# Altium PCB PCB.PcbDoc
Units mil, origin at the board's own origin, x right, y up, seen from the top; angles counter-clockwise.
Board outline 3270 x 4330 mil, 2 copper layers (Top Layer, Bottom Layer); 105 components, 51 nets, 283 pads, 395 vias.
Unrouted connection lines stored in the file: 1.
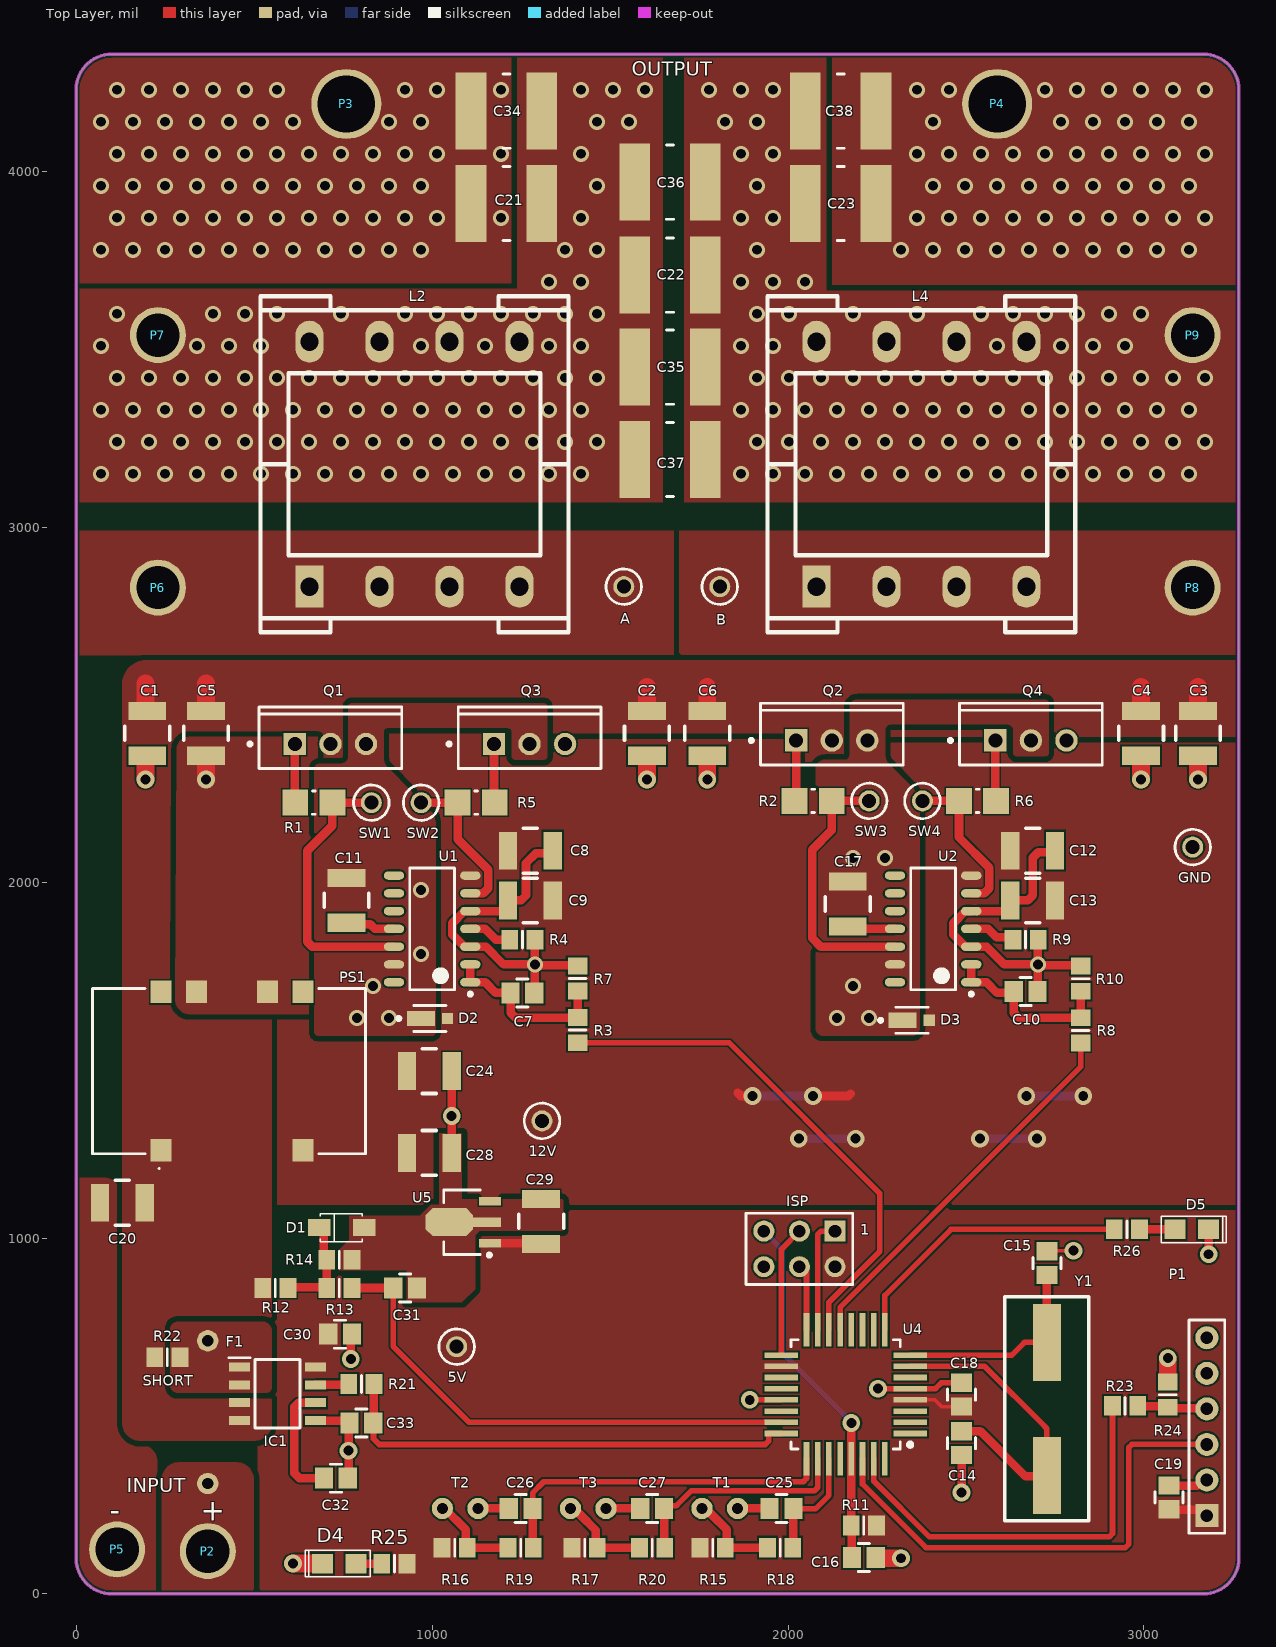
[diagram p0: Top Layer view]
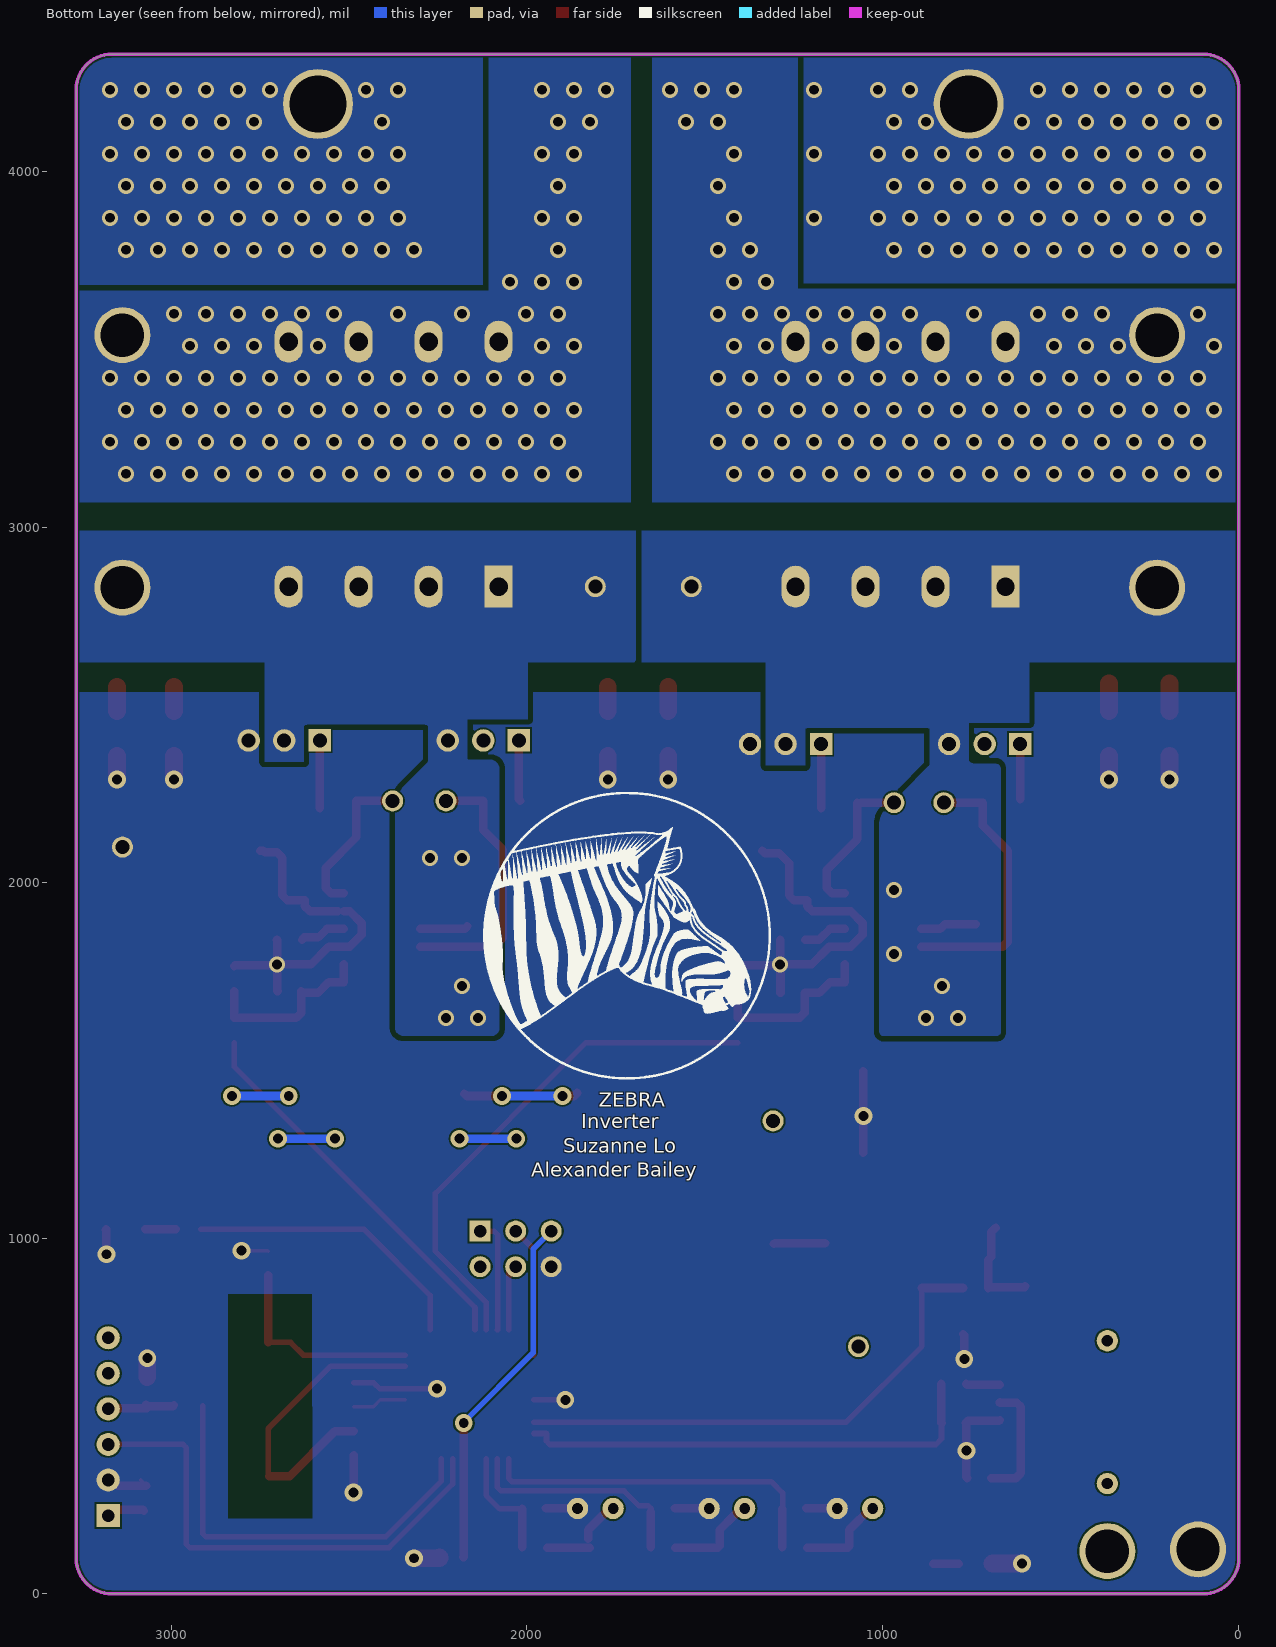
[diagram p1: Bottom Layer view, seen from below]
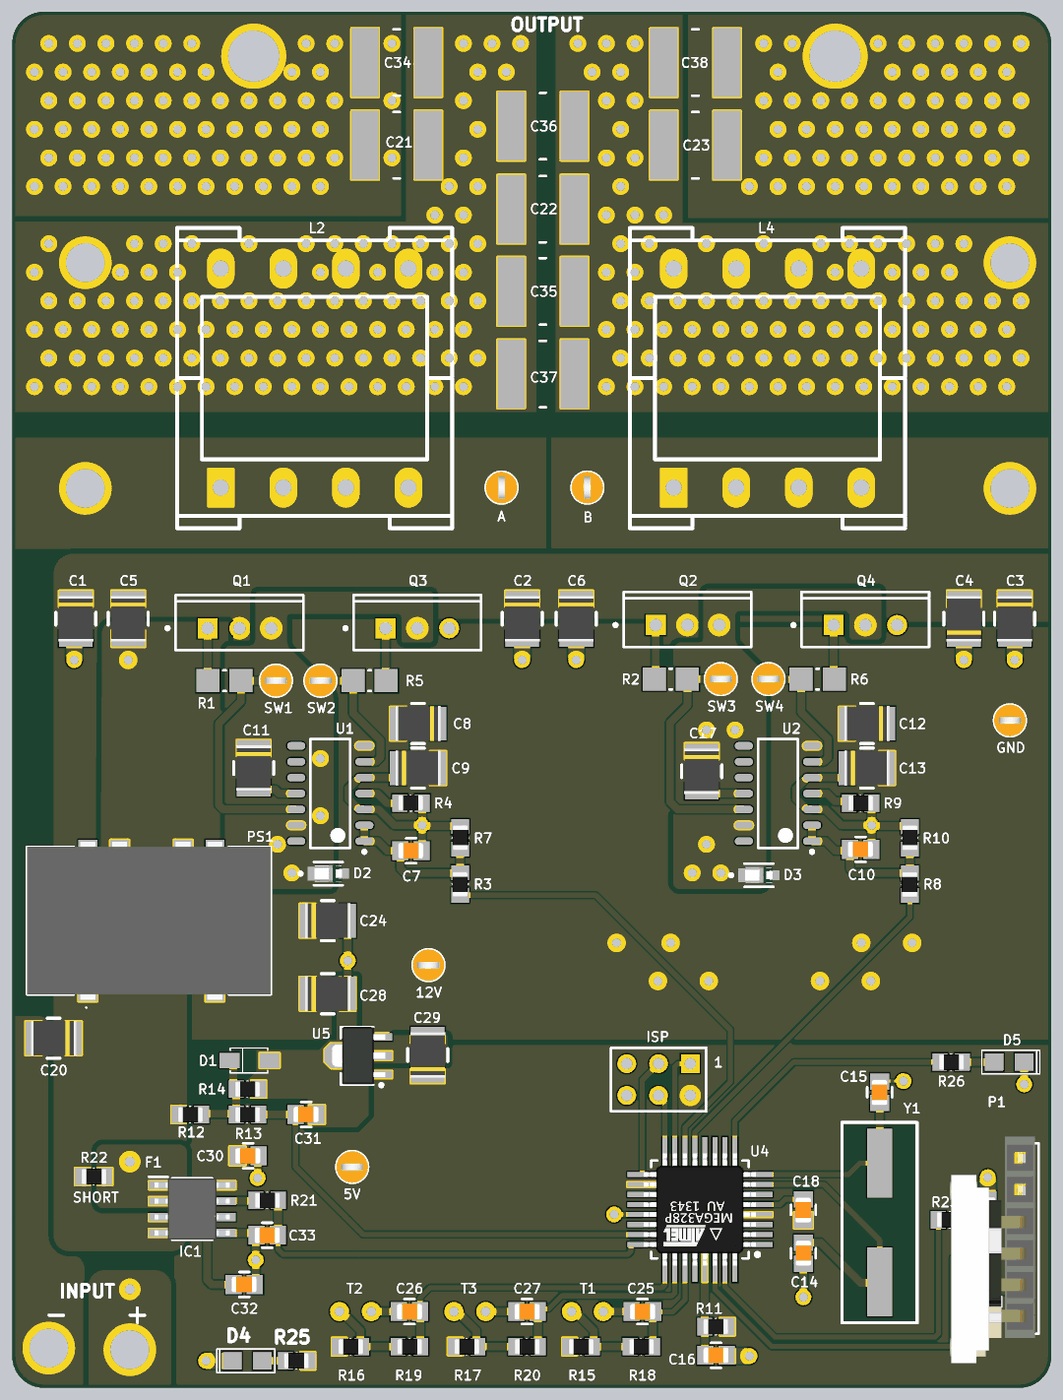
[diagram p2: 3D render of the assembled board from above, using the file's embedded part models]

## Layer stack, top to bottom
Top Solder: solder mask 0.4, Solder Resist, Dk 3.5
Top Layer: signal copper 1.4
Dielectric 1: dielectric 12.6, FR-4, Dk 4.8
Bottom Layer: signal copper 1.4
Bottom Solder: solder mask 0.4, Solder Resist, Dk 3.5

## Board outline
-2.2,100 ccw(c97.8,100) 97.8,0 3167.8,0 ccw(c3167.8,100) 3267.8,100 3267.8,4230 ccw(c3167.8,4230) 3167.8,4330 97.8,4330 ccw(c97.8,4230) -2.2,4230

## Design rules (kind name [scope] priority, off if disabled: settings)
Clearance Compensation [InNamedPolygon('LPT_A_L01_P036') Or InNamedPolygon('LPT_B_L01_P038') Or InNamedPolygon('NETC21_1_L01_P032') Or InNamedPolygon('NETC22_1_L01_P033')] p1: gap=20 ignorepadtopadclearanceinfootprint=FALSE except(78.74: Fill-Fill Fill-Poly Fill-Region Poly-Poly Poly-Region Region-Region)
Clearance [All] p2: gap=5 ignorepadtopadclearanceinfootprint=FALSE except(15.75: Fill-Fill Fill-Poly Fill-Region Poly-Poly Poly-Region Region-Region)
Height [All] p1: minheight=0 maxheight=5000 prefheight=500
HoleSize [All] p1: absolutevalues=TRUE maxlimit=165 minlimit=1 maxpercent=80.000 minpercent=20.000
MinimumSolderMaskSliver [All] p1: minsoldermaskwidth=5
PolygonConnect [All] p1: connectstyle=Direct reliefconductorwidth=10 reliefentries=4 polygonreliefangle="90 Angle" airgapwidth=0
RoutingVias [All] p1: holewidth=28 width=50 viastyle="Through Hole" minholewidth=28 minwidth=40 maxholewidth=28 maxwidth=50
SilkToSolderMaskClearance [All] p1: minsilkscreentomaskgap=1.5 clearancetoexposedcopper=TRUE
SolderMaskExpansion [All] p1: expansion=4 istentingtop=FALSE
Width "uC Route" [InComponent('U4')] p1: maxlimit=16 minlimit=16 preferedwidth=16 minimp=50.000000 maximp=50.000000 favimp=50.000000
Width [All] p2: maxlimit=50 minlimit=10 preferedwidth=24 minimp=50.000000 maximp=50.000000 favimp=50.000000
26 further rules are at their usual default settings.

## Classes and differential pairs
component class Misc: 5V 12V A B C20 C24 C25 C26 C27 C28 C29 C30 C31 C32 C33 D1 F1 GND IC1 P2 P3 P4 P5 PS1 R12 R13 R14 R15 R16 R17 R18 R19 R20 R21 R22 sw1 sw2 SW3 SW4 T1 T2 T3 U5
component class Control: C14 C15 C16 C18 C19 D4 D5 ISP P1 R11 R23 R24 R25 R26 U4 Y1
component class Bridge: C1 C2 C3 C4 C5 C6 C7 C8 C9 C10 C11 C12 C13 C17 C21 C22 C23 C34 C35 C36 C37 C38 D2 D3 L2 L4 P6 P7 P8 P9 Q1 Q2 Q3 Q4 R1 R2 R3 R4 R5 R6 R7 R8 R9 R10 U1 U2

## Components (designator, comment, footprint, x,y, rotation, side; value= is the part's Value field where it differs from the comment)
5V "5003" TP_TH 1067.8,695 r0 top (schematic designator TP5)
12V "5003" TP_TH 1307.8,1330 r0 top (schematic designator TP3)
A "5003" TP_TH 1537.8,2832.51 r90 top (schematic designator TP10)
B "5003" TP_TH 1807.8,2832.51 r90 top (schematic designator TP11)
C1 "" C1210 197.8,2420 r270 top
C2 "" C1210 1602.8,2420 r270 top
C3 "" C1210 3152.8,2420 r270 top
C4 "" C1210 2992.8,2420 r90 top
C5 "" C1210 362.8,2420 r270 top
C6 "" C1210 1772.8,2420 r270 top
C7 "" C0805 1252.8,1690 r0 top
C8 "" C1210 1274.8,2090 r180 top
C9 "" C1210 1274.8,1950 r0 top
C10 "" C0805 2667.8,1694.09 r0 top
C11 "10u" C1210 757.8,1950 r270 top
C12 "" C1210 2687.8,2090 r180 top
C13 "" C1210 2687.8,1950 r0 top
C14 "" C0805 2487.8,423.46 r270 top
C15 "" C0805 2727.8,930 r90 top
C16 "" C0805 2212.8,102.18 r0 top
C17 "10u" C1210 2167.8,1940 r270 top
C18 "" C0805 2487.8,560 r90 top
C19 "" C0805 3070.8,271 r90 top
C20 "10u" C1210 127.8,1100 r180 top
C21 "" C5750 1207.8,3910 r180 top
C22 "" C5750 1667.8,3708.59 r180 top
C23 "" C5750 2147.8,3910 r0 top
C24 "10u" C1210 990.79,1470 r0 top
C25 "" C0805 1981.26,240 r180 top
C26 "" C0805 1247.8,240 r180 top
C27 "" C0805 1617.8,240 r180 top
C28 "10u" C1210 990.79,1240 r0 top
C29 "10u" C1210 1305.39,1047.17 r90 top
C30 "" C0805 740,730 r0 top
C31 "" C0805 922.8,860 r0 top
C32 "" C0805 727.99,325 r0 top
C33 "" C0805 800,480 r180 top
C34 "" C5750 1207.8,4170 r180 top
C35 "" C5750 1667.8,3450 r180 top
C36 "" C5750 1667.8,3970 r180 top
C37 "" C5750 1667.8,3190 r180 top
C38 "" C5750 2147.8,4170 r0 top
D1 "BZT52H-B5V1" SOD123 742.8,1030 r180 top
D2 "MSS1P6-M3/89A" FP-96591-MFG 992.6,1618 r0 top value=40pF
D3 "MSS1P6-M3/89A" FP-96591-MFG 2347.8,1613 r0 top value=40pF
D4 "LTST-C170KGKT" "0805 LED" 737.8,85 r180 top
D5 "LTST-C170KGKT" "0805 LED" 3135.55,1025 r0 top
F1 "MF-RX250/72-0" TH_FUSE 367.8,310 r90 top
GND "5003" TP_TH 3137.8,2100 r0 top (schematic designator TP2)
IC1 "ACS730KLCTR-20AB-T" SOIC127P600X175-8N 564,562.5 r0 top
ISP "P2" HDR2X3 2131.81,1020 r180 top
L2 "" EFD20 949.37,3177 r90 top
L4 "" EFD20 2374.8,3177 r90 top
P1 "BLE Module Header" HM10_HDR1X6 3177.8,220 r90 top
P2 "Lug" "M3 Lug" 367.8,120 r0 top
P3 "Lug" "M4 Lug" 757.8,4190 r0 top
P4 "Lug" "M4 Lug" 2587.8,4190 r0 top
P5 "Lug" "M3 Lug" 112.8,125 r0 top
P6 "Lug" "M3 Lug" 227.8,2830 r0 top
P7 "Lug" "M3 Lug" 227.8,3540 r0 top
P8 "Lug" "M3 Lug" 3137.8,2830 r0 top
P9 "Lug" "M3 Lug" 3137.8,3540 r0 top
PS1 "STH0548S12" STH0548S12 427.8,1470 r0 top
Q1 "IPP80N04S4-04" INF-PG-TO220-3-1 712.8,2390 r90 top
Q2 "IPP80N04S4-04" INF-PG-TO220-3-1 2122.8,2400 r90 top
Q3 "IPP80N04S4-04" INF-PG-TO220-3-1 1272.8,2390 r90 top
Q4 "IPP80N04S4-04" INF-PG-TO220-3-1 2682.8,2400 r90 top
R1 "" R1206 665.96,2225 r180 top
R2 "" R1206 2070.63,2230 r180 top
R3 "" R0805 1407.8,1585.43 r90 top
R4 "" R0805 1252.8,1840 r0 top
R5 "" R1206 1122.8,2225 r180 top
R6 "" R1206 2532.8,2230 r180 top
R7 "" R0805 1407.8,1730.43 r270 top
R8 "" R0805 2822.8,1584.57 r90 top
R9 "" R0805 2667.8,1840 r180 top
R10 "" R0805 2822.8,1730 r270 top
R11 "" R0805 2212.8,192.18 r0 top
R12 "" R0805 557.8,860 r180 top
R13 "" R0805 737.8,860 r180 top
R14 "" R0805 737.8,940 r180 top
R15 "" R0805 1787.8,130 r180 top
R16 "" R0805 1062.36,130 r180 top
R17 "" R0805 1427.8,130 r180 top
R18 "" R0805 1977.8,130 r180 top
R19 "" R0805 1247.8,130 r180 top
R20 "" R0805 1617.8,130 r180 top
R21 "" R0805 800,590 r180 top
R22 "0R" R0805 254,665 r180 top
R23 "" R0805 2947.8,528.5 r0 top
R24 "" R0805 3067.8,560 r270 top
R25 "" R0805 892.8,85 r0 top
R26 "" R0805 2952.8,1025 r180 top
SW1 "5003" TP_TH 827.8,2225 r0 top (schematic designator TP6)
SW2 "5003" TP_TH 967.8,2225 r0 top (schematic designator TP7)
SW3 "5003" TP_TH 2227.8,2230 r0 top (schematic designator TP8)
SW4 "5003" TP_TH 2377.8,2230 r0 top (schematic designator TP9)
T1 "Thermistor" LeadedThermistor 1857.8,240 r90 top
T2 "Thermistor" LeadedThermistor 1127.8,240 r90 top
T3 "Thermistor" LeadedThermistor 1487.8,240 r90 top
U1 "IR21834STRPBF" SOIC127P600X175-14N 998.8,1870 r180 top
U2 "IR21834STRPBF" SOIC127P600X175-14N 2407.8,1870 r180 top
U4 "ATmega328PB MCU" "32 - TQFP" 2162.05,561.1 r180 top
U5 "L78L05" SOT-89 1082.8,1045 r180 top
Y1 "SMT-XTAL 16MHz" HC49-US 2727.8,520 r90 top

## Footprints (in the part's own frame and the unit in brackets; to place one, negate y for a bottom-side part, rotate by r counter-clockwise, add the part's x,y. Pads: shape width x height; smd on the part's side, far side on the other; paste and mask are expansions set on the pad)
"32 - TQFP" [mm]
  rect 2.4x0.4 smd: 1(-4.6,2.8) 2(-4.6,2) 3(-4.6,1.2) 4(-4.6,0.4) 5(-4.6,-0.4) 6(-4.6,-1.2) 7(-4.6,-2) 8(-4.6,-2.8) 17(4.6,-2.8) 18(4.6,-2) 19(4.6,-1.2) 20(4.6,-0.4) 21(4.6,0.4) 22(4.6,1.2) 23(4.6,2) 24(4.6,2.8)
  rect 0.4x2.4 smd: 9(-2.8,-4.6) 10(-2,-4.6) 11(-1.2,-4.6) 12(-0.4,-4.6) 13(0.4,-4.6) 14(1.2,-4.6) 15(2,-4.6) 16(2.8,-4.6) 25(2.8,4.6) 26(2,4.6) 27(1.2,4.6) 28(0.4,4.6) 29(-0.4,4.6) 30(-1.2,4.6) 31(-2,4.6) 32(-2.8,4.6)
  silkscreen extent -4.74,-3.9 3.9,3.9, body extent -4.5,-4.5 4.5,4.5, height 1.3
"0805 LED" [mm] "RED AS AlGaAs SMD LED, Body; 2mm x 1.25 mm (LxW)"
  rect 1.5x1.4 smd: 1(-1.2,0) 2(1.2,0)
  silkscreen extent -2.2,-0.95 2.45,0.95, body extent -1,-0.63 1,0.63, height 1.1
C0805 [mm]
  rect 1.3x1.5 smd: 1(-0.85,0) 2(0.85,0)
  silkscreen extent -0.4,-1 0.4,1, body extent -1.03,-0.63 1,0.64, height 0.65
C1210 [mm]
  rect 1.3x2.7 smd: 1(-1.6,0) 2(1.6,0)
  silkscreen extent -0.5,-1.6 0.5,1.6, body extent -1.8,-1.4 1.8,1.4, height 1.24
C5750 [mm] "C5750 footprint"
  rect 2.2x5.5 smd: 1(-2.525,0) 2(2.525,0)
  silkscreen extent -0.25,-2.65 0.25,2.65, body extent -3.05,-2.7 3.05,2.7, height 3.2
EFD20 [mm]
  oval 3x2 hole 1.3: 1(-8.75,-7.5) 1(-8.75,-2.5) 1(-8.75,2.5) 2(8.75,-7.5) 2(8.75,-2.5) 2(8.75,2.5) 2(8.75,7.5)
  rect 3x2 hole 1.3: 1(-8.75,7.5)
  silkscreen extent -12,-11 12,11
FP-96591-MFG [mm]
  rect 2x1.1 smd paste+0 mask+0: 1(-0.65,0)
  rect 0.8x0.8 smd paste+0 mask+0: 2(1.25,0)
  silkscreen extent -2.35,-0.92 1.15,0.92, body extent -1.75,-0.8 1.75,0.8, height 0.25
HC49-US [mm] "20Mhz Crystal"
  rect 5.5x2 smd: 1(-4.75,0) 2(4.75,0)
  silkscreen extent -8,-3 8,3, body extent -4.79,-2.4 4.79,2.4, height 3.8
HDR2X3 [mm] "Connector; Header; 3x2 Position"
  rect 1.5x1.5 hole 0.9: 1(0,0)
  round 1.5 hole 0.9: 2(0,2.54) 3(2.54,0) 4(2.54,2.54) 5(5.08,0) 6(5.08,2.54)
  silkscreen extent -1.27,-1.27 6.35,3.81
HM10_HDR1X6 [mil] "Connector; Header; 6 Position"
  rect 65x65 hole 35.43: 1(0,0)
  round 65 hole 35.43: 2(100,0) 3(200,0) 4(300,0) 5(400,0) 6(500,0)
  silkscreen extent -50,-50 550,50, body extent -142,-39 571,228, height 1843
INF-PG-TO220-3-1 [mm] "FM, 3-Leads, Body 10x4.4mm, Pitch 2.54mm"
  rect 1.6x1.6 hole 1: 1(0,2.54)
  round 1.6 hole 1: 2(0,0) 3(0,-2.54)
  silkscreen extent -1.75,-5.1 2.65,5.87, body extent -1.75,-5.1 2.65,5.1, height 20.7
LeadedThermistor [mil]
  round 60 hole 30: 1(0,0) 2(0,100)
"M3 Lug" [mm]
  round 4 hole 3.1: 1(0,0)
"M4 Lug" [mm]
  round 5 hole 4.1: 1(0,0)
R0805 [mm]
  rect 1.2x1.4 smd: 1(-0.9,0) 2(0.9,0)
  silkscreen extent 0,-0.6 0,0.6, body extent -1.04,-0.63 0.99,0.64, height 0.6
R1206 [mm] "Chip Resistor, 2-Leads, Body 3.20x1.60mm, IPC Low Density"
  rect 1.85x1.85 smd: 1(-1.325,0) 2(1.325,0)
  silkscreen extent -0.1,-0.82 0.1,0.82, body extent -1.7,-0.87 1.7,0.87, height 0.65
SOD123 [mm] "SOD-123; 2 Leads; Body 2.7 x 1.6 mm, (LxW)"
  rect 1.6x1.2 smd: 1(-1.65,0) 2(1.55,0)
  silkscreen extent -1.5,-1 1.5,1, body extent -1.8,-0.86 1.8,0.86, height 1.21
SOIC127P600X175-8N [mm]
  rect 1.525x0.65 smd: 1(-2.712,1.905) 2(-2.712,0.635) 3(-2.712,-0.635) 4(-2.712,-1.905) 5(2.712,-1.905) 6(2.712,-0.635) 7(2.712,0.635) 8(2.712,1.905)
  silkscreen extent -3.47,-2.45 1.6,2.58, body extent -3,-2.45 3,2.45, height 1.75
SOIC127P600X175-14N [mm] "SOIC, 14-Leads, Body 8.65x3.90mm, Pitch 1.27mm, IPC Medium Density"
  oval 1.45x0.6 smd: 1(-2.725,3.81) 2(-2.725,2.54) 3(-2.725,1.27) 4(-2.725,0) 5(-2.725,-1.27) 6(-2.725,-2.54) 7(-2.725,-3.81) 8(2.725,-3.81) 9(2.725,-2.54) 10(2.725,-1.27) 11(2.725,0) 12(2.725,1.27) 13(2.725,2.54) 14(2.725,3.81)
  silkscreen extent -2.85,-4.35 1.6,4.78, body extent -2,-4.35 2,4.35, height 1.75
SOT-89 [mm] "SOT89, 3-Leads, Body 4.5x2.4 mm, Pitch 1.5mm, Lead Span 4.1mm, IPC Low Density"
  rect 1.6x0.6 smd: 1(-2,1.5) 3(-2,-1.5)
  rect 2x0.7 smd: 2(-1.8,0)
  oct 3.4x2 smd: 2(0.9,0)
  silkscreen extent -2.08,-2.3 1.3,2.47, body extent -2.25,-2.29 2,2.29, height 1.6
STH0548S12 [mm]
  rect 1.5x1.61 smd: 1(-4.88,-5.655) 5(5.28,-5.655) 6(5.28,5.655) 7(2.74,5.655) 9(-2.34,5.655) 10(-4.88,5.655)
  silkscreen extent -9.75,-7 9.75,5.9, body extent -9.75,-6.31 9.75,6.31, height 5.6
TH_FUSE [mil]
  round 60 hole 31.89: 1(0,0) 2(401.57,0)
TP_TH [mm] "Test Point, Through Hole, Dia 2.54mm"
  round 1.5 hole 1: 1(0,0)
  silkscreen extent -1.27,-1.27 1.27,1.27, body extent -1.27,-1.27 1.27,1.27, height 4.57

## Part data
5V 12V A B GND SW1 SW2 SW3 SW4: library part TestPoint, "Test Point, Orange, 1-Pin THD, RoHS", Forward Current="3 A", Forward Voltage="1.08 V", Max Operating Temperature="150 degC", Max Surge Current="80 A", Min Operating Temperature="-65 degC", Package Quantity=500, Peak Reverse Current="600 uA", ComponentLink1Description="Manufacturer URL", ComponentLink1URL=http://www.keyelco.com/, ComponentLink2Description=Datasheet, ComponentLink2URL=http://keyelco.com/userAssets/file/M65p56.pdf, DatasheetVersion=Jun-15, Diameter="5.3 mm", Height="0.25 inch", Length="9.5 mm", Mount="Through Hole", PackageDescription="1-Pin Through Hole Device, Dia 2.54 mm", PackageReference=5003, Packaging=Bulk, Pins=2, Radiation Hardening=No, REACH SVHC="No SVHC", RoHSCompliant=true, Weight="0.01 lb", Width="0.25 inch"
C1 C2 C3 C4 C5 C6 C7 C8 C9 C10 C11 C12 C13 C14 C15 C16 C17 C18 C19 C20 C21 C22 C23 C24 C25 C26 C27 C28 C29 C30 C31 C32 C33 C34 C35 C36 C37 C38: library part CerCap_SMT, "SMT ceramic capacitor selectable size"
D1: library part Zener_SMT_SOD123, "SMT zener diode with SOD123 package", Manufacturer="Nexperia USA Inc.", Manufacturer Part Number=BZT52H-B5V1,115, Operating Temperature="-65°C ~ 150°C (TA)", Package / Case=SOD-123F, Tolerance=±2%, Category="Discrete Semiconductor Products", ComponentLink1Description=https://assets.nexperia.com/documents/data-sheet/BZT52H_SER.pdf, ComponentLink1URL=https://assets.nexperia.com/documents/data-sheet/BZT52H_SER.pdf, Mounting Type="Surface Mount", Packaging="Cut Tape (CT)", Part Status=Active, Pricing 1="1=0.51, 10=0.408, 100=0.2164, 500=0.14232, 1000=0.09678 (NZD)", RoHS="RoHS Compliant", Stock 1=0, Supplier 1=Digi-Key, Supplier Device Package=SOD-123F
D2 D3: "DIODE SCHOTTKY 60V 1A MICROSMP", Capacitance=40pF, Forward Current=1A, Manufacturer=Vishay, Max Junction Temp=+150°C, Max Repetitive Reverse Voltage=60V, Max Surge Forward Current=25A, Package=96591, Peak Reverse Current=20uA, Temperature="-55°C to +150°C", Temperature Range Low=-55°C, Automotive=No, Category=Diode, ComponentLink2Description=Datasheet, ComponentLink2URL=http://www.vishay.com/docs/89018/mss1p6.pdf, Device Class L1="Discrete Semiconductors", Device Class L2=Diodes, Device Class L3="Schottky Diodes", Digikey Description="DIODE SCHOTTKY 60V 1A MICROSMP", Footprint Url=http://www.vishay.com/docs/96591/microsmp_do-219ad_fredpt.pdf, Height=0.73mm, Lead Free=Yes, Manufacturer Part Number=MSS1P6-M3/89A, Mouser Description="Schottky Diodes & Rectifiers 1.0 Amp 60 Volt", Octopart=https://octopart.com/mss1p6-m3%2F89a-vishay-42763284, RoHS=TRUE, Temperature Range High=+150°C
D4 D5: library part LED_SMT_0805, "SMT LED 0805 size", Color=Green, Current - Test=20mA, Lens Color=Colorless, Manufacturer="Lite-On Inc.", Millicandela Rating=35mcd, Package / Case="0805 (2012 Metric)", Supplier Part Number 1=160-1414-1-ND, Voltage - Forward (Vf) (Typ)=2V, Category=Optoelectronics, ComponentLink1Description=http://optoelectronics.liteon.com/upload/download/DS22-2000-073/LTST-C170KGKT.pdf, ComponentLink1URL=http://optoelectronics.liteon.com/upload/download/DS22-2000-073/LTST-C170KGKT.pdf, Features=-, Height (Max)=1.10mm, Lens Style/Size="Rectangle with Flat Top, 1.40mm x 1.25mm", Lens Transparency=Clear, Manufacturer Part Number=LTST-C170KGKT, Mounting Type="Surface Mount", Packaging="Cut Tape (CT)", Part Status=Active, Pricing 1="1=0.62, 10=0.459, 25=0.338, 100=0.2415, 250=0.16416, 500=0.14486, 1000=0.11347 (NZD)", RoHS="RoHS Compliant", Size / Dimension="2.00mm L x 1.25mm W", Stock 1=503069, Supplier 1=Digi-Key, Viewing Angle=130°, Wavelength - Dominant=571nm, Wavelength - Peak=574nm
F1: "PTC Resettable Fuse 2.5A(hold) 5A(trip) 72V 40A 2.5W 15.6s 0.05Ohm Radial 17.84 X 3.1 X 23.84mm Bulk", Case/Package=Radial, Current Rating=40A, Flammability Rating="UL94 V-0", Hold Current=2.5A, Manufacturer=Bourns, Max Operating Temperature=85°C, Max Power Dissipation=2.5W, Min Operating Temperature=-40°C, Operating Supply Voltage=72V, Package Quantity=500, Resistance=80mR, Trip Current=5A, Voltage Rating (AC)=60V, Approvals=UL, Body Diameter=21.3mm, Body Height=23.84mm, Body Length=17.84mm, Body Material=Polymer,Epoxy, Category="PTC Resettable Fuses", ComponentLink1Description=https://datasheet.ciiva.com/1274/1727898-1274752.pdf?src-supplier=Element14, ComponentLink1URL=https://datasheet.ciiva.com/1274/1727898-1274752.pdf?src-supplier=Element14, ComponentLink2Description=https://datasheet.ciiva.com/3019/mfrx72-3019851.pdf?src-supplier=Avnet, ComponentLink2URL=https://datasheet.ciiva.com/3019/mfrx72-3019851.pdf?src-supplier=Avnet, ComponentLink3Description=https://datasheet.ciiva.com/4501/mfrx72-4501292.pdf?src-supplier=Mouser, ComponentLink3URL=https://datasheet.ciiva.com/4501/mfrx72-4501292.pdf?src-supplier=Mouser, ComponentLink4Description=https://datasheet.ciiva.com/32425/mf-rx72-series-eng-tds-32425991.pdf?src-supplier=Distrelec, ComponentLink4URL=https://datasheet.ciiva.com/32425/mf-rx72-series-eng-tds-32425991.pdf?src-supplier=Distrelec, ComponentLink5Description=https://datasheet.ciiva.com/326/mfrx72-326639.pdf?src-supplier=Digi-Key, ComponentLink5URL=https://datasheet.ciiva.com/326/mfrx72-326639.pdf?src-supplier=Digi-Key, ComponentLink6Description=https://datasheet.ciiva.com/17401/mfrx72-17401583.pdf?src-supplier=Avnet+Europe, ComponentLink6URL=https://datasheet.ciiva.com/17401/mfrx72-17401583.pdf?src-supplier=Avnet+Europe, ComponentLink7Description=https://datasheet.ciiva.com/14539/70153449-14539563.pdf?src-supplier=Allied+Electronics, ComponentLink7URL=https://datasheet.ciiva.com/14539/70153449-14539563.pdf?src-supplier=Allied+Electronics, ComponentLink8Description=https://datasheet.ciiva.com/15187/getdatasheetpartid-298829-15187739.pdf?src-supplier=Verical, ComponentLink8URL=https://datasheet.ciiva.com/15187/getdatasheetpartid-298829-15187739.pdf?src-supplier=Verical, ComponentLink9Description=https://datasheet.ciiva.com/30097/669mfrx72-30097310.pdf?src-supplier=Onlinecomponents.com, ComponentLink9URL=https://datasheet.ciiva.com/30097/669mfrx72-30097310.pdf?src-supplier=Onlinecomponents.com, Contact Plating=Tin, Height=3.1mm, Lead Diameter=0.81mm, Lead Free="Lead Free", Lead Length=7.6mm, Lead Pitch=10.2mm, Length=31.44mm, Manufacturer Part Number=MF-RX250/72-0, Max Current Rating=40A, Mount="Through Hole,PCB", Number of Pins=2, Number of Terminals/Pins=2, Packaging=Bulk, Power Dissipation=2.5W, Pricing 1="1=0.60000, 5=0.58400, 10=0.56700, 50=0.47700, 100=0.39600, 250=0.36000, 500=0.30600, 1000=0.27000, 5000=0.24300 (USD)", Radiation Hardening=No, REACH SVHC="No SVHC", RoHS=Yes, RoHS Compliant=Yes, Series=MF-RX/72, Stock 1=206, Supplier 1=Digi-Key, Terminal Pitch=10.2mm, Termination=Radial, Thickness=3.1mm, Time to Trip=15.6s, Voltage Rating=72V, Voltage Rating (DC)=72V, Width=17.84mm, Wire/Cable Diameter=0.81mm
IC1: "Integrated Circuit", Manufacturer_Name="Allegro Microsystems", Arrow Part Number=ACS730KLCTR-20AB-T, Arrow Price/Stock=https://www.arrow.com/en/products/acs730klctr-20ab-t/allegro-microsystems?region=nac, Datasheet Link=https://www.allegromicro.com/-/media/files/datasheets/acs730-datasheet.ashx, Height=1.75mm, Manufacturer_Part_Number=ACS730KLCTR-20AB-T
ISP: library part "Header 3X2", "Header, 3-Pin, Dual row", LatestRevisionDate=17-Jul-2002, LatestRevisionNote="Re-released for DXP Platform.", Publisher="Altium Limited"
L2 L4: library part L
P1: library part BLEModule_TH, "2.54mm pitch 6-pin header for BLE module", LatestRevisionDate=17-Jul-2002, LatestRevisionNote="Re-released for DXP Platform.", Publisher="Altium Limited"
PS1: "Power Supply", Manufacturer_Name="XP POWER", Manufacturer_Part_Number=STH0548S15, Datasheet Link=https://4donline.ihs.com/images/VipMasterIC/IC/XPPO/XPPO-S-A0009456324/XPPO-S-A0009456324-1.pdf?hkey=EF798316E3902B6ED9A73243A3159BB0, Height=5.5mm
Q1 Q2 Q3 Q4: "OptiMOS-T2 Power-Transistor, 40 V VDS, 80 A ID, PG-TO220-3-1, Tube, Green", Manufacturer=Infineon, ComponentLink1Description="Manufacturer URL", ComponentLink1URL=http://www.infineon.com/, ComponentLink2Description=Datasheet, ComponentLink2URL=http://www.infineon.com/dgdl/IPP_B_I80N04S4-04_DS_1_0.pdf?folderId=db3a304412b407950112b42b75b74520&fileId=db3a304328c6bd5c01291c71d4085dfa&location=en.Products.Automotive_ICs.Automotive_MOSFETs.Single__N-Channel_40V_MOSFETs.DATASHEET.IPP_B_I80N04S4-04_DS_, ComponentLink3Description="Package Specification", ComponentLink3URL=http://www.infineon.com/dgdl/BTS117_DS_14.pdf?folderId=db3a30431400ef68011421b54e2e0564&fileId=db3a30433a747525013abff8302d549c&location=en.Products.Automotive_ICs.Smart_High-_and_Low-Side_Switches.HITFET___TEMPFET__-_Smart_Low-Side_Switches.DATASHEET.BTS1, DatasheetVersion="Rev. 1.0", Green=TRUE, Halogen-free=TRUE, ID (max)="80 A", IDpuls (max)="320 A", Mounting Technology="Through Hole", PackageDescription="3-Pin Plastic (Green) Transistor Single Outline Package, 10 x 9.25 mm Body, 2.54 mm Pitch", PackageReference=PG-TO220-3-1, PackageVersion=Jul-12, Packing=Tube, PartNumber=IPP80N04S4-04, Ptot (max)="71 W", QG="33 nC", RDS (on) (max) (@10V)="4.6 mOhm", RthJC (max)="2.1 K/W", Technology=OptiMOS-T2, VDS (max)="40 V", VGS(th) (max)="4 V", VGS(th) (min)="2 V"
R1 R2 R3 R4 R5 R6 R7 R8 R9 R10 R11 R12 R13 R14 R15 R16 R17 R18 R19 R20 R21 R22 R23 R24 R25 R26: library part Res_SMT, "0805 or 1206 resistor", ComponentLink1Description=https://nz.mouser.com/datasheet/2/315/AOA0000C304-1149620.pdf, LatestRevisionDate=17-Jul-2002, LatestRevisionNote="Re-released for DXP Platform.", PackageReference=AXIAL-0.4, Published=8-Jun-2000, Publisher="Altium Limited"
U1 U2: "600 V half-bridge gate driver IC with programmable deadtime, SOIC 14N, RoHS", Case/Package=SOIC, Manufacturer="International Rectifier", Max Operating Temperature=125°C, Max Output Current=2.3A, Max Power Dissipation=1W, Max Supply Current=1.6mA, Max Supply Voltage=20V, Min Operating Temperature=-40°C, Min Supply Voltage=10V, Nominal Supply Current=1mA, Output Current=1.9A, Package Quantity=1, Category="Gate Drivers", ComponentLink1Description=https://datasheet.ciiva.com/26878/ir21834strpbf-26878870.pdf?src-supplier=IIIC, ComponentLink1URL=https://datasheet.ciiva.com/26878/ir21834strpbf-26878870.pdf?src-supplier=IIIC, ComponentLink2Description=https://datasheet.ciiva.com/8068/ir2183-8068250.pdf?src-supplier=Element14, ComponentLink2URL=https://datasheet.ciiva.com/8068/ir2183-8068250.pdf?src-supplier=Element14, ComponentLink3Description=https://datasheet.ciiva.com/1950/ir2183-1950222.pdf?src-supplier=Digi-Key, ComponentLink3URL=https://datasheet.ciiva.com/1950/ir2183-1950222.pdf?src-supplier=Digi-Key, ComponentLink4Description=https://datasheet.ciiva.com/1950/ir2183-1950223.pdf?src-supplier=Digi-Key, ComponentLink4URL=https://datasheet.ciiva.com/1950/ir2183-1950223.pdf?src-supplier=Digi-Key, ComponentLink5Description=https://datasheet.ciiva.com/1950/ir2183-1950221.pdf?src-supplier=Digi-Key, ComponentLink5URL=https://datasheet.ciiva.com/1950/ir2183-1950221.pdf?src-supplier=Digi-Key, ComponentLink6Description=https://datasheet.ciiva.com/16287/ir2183-16287545.pdf?src-supplier=Future+Electronics, ComponentLink6URL=https://datasheet.ciiva.com/16287/ir2183-16287545.pdf?src-supplier=Future+Electronics, Fall Time=35ns, Height=1.5mm, Length=8.74mm, Manufacturer Part Number=IR21834STRPBF, Mount="Surface Mount", Number of Drivers=2, Number of Outputs=2, Number of Pins=14, Output Voltage=20V, Packaging="Tape and Reel", Power Dissipation=1W, Propagation Delay=330ns, REACH SVHC="No SVHC", Rise Time=60ns, RoHS=Yes, RoHS Compliant=Yes, Series=-, Supplier 1=Newark, Turn-Off Delay Time=35ns, Turn-On Delay Time=35ns, Width=3.99mm
U4: library part ATmega328PB_SMT_TQFP32, "IC MCU 8BIT 32KB FLASH 32TQFP", Manufacturer=Atmel, Manufacturer Part Number=ATMEGA328PB-AN, Operating Temperature="-40°C ~ 105°C (TA)", Package / Case=32-TQFP, Supplier Device Package="32-TQFP (7x7)", Voltage - Supply (Vcc/Vdd)="1.8 V ~ 5.5 V", Category="Integrated Circuits (ICs)", ComponentLink1Description=http://www.atmel.com/images/atmel-42397-8-bit-avr-microcontroller-atmega328pb_datasheet.pdf, ComponentLink1URL=http://www.atmel.com/images/atmel-42397-8-bit-avr-microcontroller-atmega328pb_datasheet.pdf, Connectivity="I²C, SPI, UART/USART", Core Processor=AVR, Core Size=8-Bit, Data Converters="A/D 8x10b", EEPROM Size="1K x 8", Number of I/O=27, Oscillator Type=Internal, Packaging=Tray, Part Status=Active, Peripherals="Brown-out Detect/Reset, POR, PWM, WDT", Pricing 1="1=2.74, 10=2.448, 25=2.2032, 100=2.0074, 250=1.81152, 500=1.62548, 1000=1.37088 (USD)", Program Memory Size="32KB (16K x 16)", Program Memory Type=FLASH, RAM Size="2K x 8", RoHS="RoHS Compliant", Speed=20MHz, Stock 1=366, Supplier 1=Digi-Key
U5: library part L78L05_SMT_SOT89, "LDO Voltage Regulator 5V", Supplier Part Number 1=497-1181-1-ND, ComponentLink1Description=http://www.st.com/content/ccc/resource/technical/document/datasheet/99/3b/7d/91/91/51/4b/be/CD00000544.pdf/files/CD00000544.pdf/jcr:content/translations/en.CD00000544.pdf, ComponentLink1URL=http://www.st.com/content/ccc/resource/technical/document/datasheet/99/3b/7d/91/91/51/4b/be/CD00000544.pdf/files/CD00000544.pdf/jcr:content/translations/en.CD00000544.pdf, Supplier 1=Digi-Key
Y1: library part TXC9C-16_XTAL_SMT, "9C-16.000MAAJ-T crystal 16.0000MHZ 18PF SMD", Frequency Stability=±30ppm, Load Capacitance=18pF, Manufacturer="TXC CORPORATION", Manufacturer Part Number=9C-16.000MAAJ-T, Operating Mode=Fundamental, Operating Temperature="-20°C ~ 70°C", Package / Case=HC-49/US, Ratings=-, Supplier Part Number 1=887-1059-1-ND, Category="Crystals, Oscillators, Resonators", ComponentLink1Description=http://www.txccorp.com/download/products/quartz_crystals/2015TXC_9C_32.pdf, ComponentLink1URL=http://www.txccorp.com/download/products/quartz_crystals/2015TXC_9C_32.pdf, Frequency Tolerance=±30ppm, Height - Seated (Max)="0.161\" (4.10mm)", Mounting Type="Surface Mount", Packaging="Cut Tape (CT)", Part Status=Active, Pricing 1="1=0.75, 10=0.628, 50=0.5656, 100=0.5026, 500=0.47744 (NZD)", RoHS="RoHS Compliant", Size / Dimension="0.449\" L x 0.189\" W (11.40mm x 4.80mm)", Stock 1=11514, Supplier 1=Digi-Key, Type="MHz Crystal"

## Via types
v1: diameter 45, hole 28, Top Layer to Bottom Layer, 369 vias
v2: diameter 50, hole 28, Top Layer to Bottom Layer, 26 vias

## Nets (pads, with @x,y where several pads share a name; then routed paths per layer and width w, separated by ;. In a path a pad name is that pad's centre, name@x,y a point inside that pad or via, vN(x,y) a via of type N, cw(c..) or ccw(c..) an arc to the next point about the centre after c; other vN are vias at no path point)
5V: 5V.1 C18.1 C19.1 C29.1 C30.1 IC1.8 ISP.2 P1.1 R11.2 R15.2 R16.2 R17.2 R25.2 U4.4 U4.18 U5.1 | length 405.5
  Top Layer w10: U4.4 2412.44,545.35 2431.26,526.54 C18.1
  Top Layer w24: U5.1 1161.72,985.76 1303.81,985.76 C29.1 ; C19.1@3077.53,233.27 3080.8,236.54 3161.26,236.54 P1.1
12V: 12V.1 C8.2 C9.2 C12.2 C13.2 C24.1 C28.1 D2.2 D3.2 PS1.5 U1.7 U2.7 U5.3 | length 814.5
  Top Layer w24: 1858,1409 1867,1400 1869,1400 ; 1862,1407 1869,1400 ; v2(1900,1400) 1869,1400 ; v2(2070,1400) 2169,1400 2176,1407
  Bottom Layer w24: v2(1900,1400) v2(2070,1400) ; v2(2030,1280) v2(2190,1280) ; v2(2540,1280) v2(2700,1280) ; v2(2670,1400) v2(2830,1400)
30V: C1.1 C2.1 C3.1 C4.2 C5.1 C6.1 C20.1 IC1.3 IC1.4 PS1.1 Q1.2 Q2.2 R12.2 R22.2 | length 422
  Top Layer w50: C1.1@192.8,2482.99 192.8,2560 ; C5.1 362.8,2560 ; C2.1 1602.8,2550 ; C6.1 1772.8,2550 ; C4.2 2992.8,2550 ; C3.1 3152.8,2550
A: A.1 C11.1 D2.1 L2.1 P6.1 Q1.3 Q3.2 U1.13 | length 25.2
  Bottom Layer w50: L2.1@850.94,2824.81 L2.1@850.94,2850
  other v1: 787.8,1620 877.8,1620 832.8,1710 967.8,1800 967.8,1980
B: B.1 C17.1 D3.1 L4.1 P8.1 Q2.3 Q4.2 U2.13
  other v1: 2137.8,1620 2227.8,1620 2182.8,1710 2182.8,2070 2272.8,2070
DEBUG: R26.2 U4.9 | length 819.2
  Top Layer w15.7: U4.9 2272.28,839.49 2457.8,1025 R26.2
GND: C1.2 C2.2 C3.2 C4.1 C5.2 C6.2 C7.2 C8.1 C9.1 C10.2 C12.1 C13.1 C14.2 C15.2 C16.2 C18.2 C19.2 C20.2 C24.2 C25.2 C26.2 C27.2 C28.2 C29.2 C30.2 C31.2 C32.2 C33.2 D1.1 D4.2 D5.2 GND.1 IC1.5 ISP.6 P1.2 P5.1 PS1.7 PS1.9 Q3.3 Q4.3 R4.2 R7.1 R9.1 R10.1 R14.1 R24.1 T1.1 T2.1 T3.1 U1.3 U1.5 U2.3 U2.5 U4.5 U4.21 U5.2 | length 4165.5
  Top Layer w10: v2(1892.15,545.65) v2@1892.44,545.35 ; C15.2 2729.33,965 v2(2802.8,965) ; C19.2 C19.2@3086.33,320
  Top Layer w15.7: v2@1892.44,545.35 U4.21 ; v2(2252.72,576.85) U4.5 2414.59,576.85 2431.2,593.46 C18.2
  Top Layer w24: IC1.5 671.56,486.7 759.83,486.7 C33.2 764,477.46 v2(764,402.5) 764,327.54 C32.2 ; v2(770,660) 770,726.54 C30.2 ; C28.2 v2(1053.78,1344.02) C24.2 ; T2.1 C26.2 ; C7.2 1287.03,1690.77 1287.03,1769.23 v1(1287.8,1770) ; R4.2 1288.01,1839.78 1288.01,1770.22 v1(1287.8,1770) ; C8.1 1330.26,2082.47 1290.26,2082.47 1262.8,2055 1262.8,1964.06 1248.74,1950 C9.1 1211.81,1933.59 1198.22,1920 U1.5 1089.72,1920 1055.54,1885.81 1055.54,1854.19 1089.72,1820 U1.3 1106.27,1819.81 1149.9,1819.81 1199.71,1770 v1(1287.8,1770) ; R7.1 1405.73,1767.93 1289.86,1767.93 v1(1287.8,1770) ; T3.1 C27.2 ; T1.1 C25.2 ; v2(2487.8,285) C14.2 ; U2.5 2498.72,1920 2464.54,1885.81 2464.54,1854.19 2498.72,1820 U2.3 2515.27,1819.81 2557.98,1819.81 2607.8,1770 v1@2702.24,1770 ; U2.5@2531.62,1920 2611.21,1920 2624.8,1933.59 C13.1 2673.74,1950 2687.8,1964.06 2687.8,2070 2703.26,2085.46 2737.2,2085.46 2741.74,2090 C12.1 ; C10.2 2702.24,1695.08 v1@2702.24,1770 ; R9.1 2702.24,1839.02 v1@2702.24,1770 ; R10.1 2820.51,1767.72 2705.08,1767.72 v1(2702.8,1770) v1@2702.24,1770 ; C19.2 3151.17,304.46 3166.7,320 P1.2 ; v2(3182.8,955) D5.2 D5.2@3185.3,1022.5 ; v2@3185.3,957.5 v2@3187.8,955
  Top Layer w50: v2(192.8,2290) C1.2@192.8,2357.01 ; v2(362.8,2290) C5.2 ; v2(607.8,85) D4.2 ; v2(1602.8,2290) C2.2 ; v2(1772.8,2290) C6.2 ; C16.2 2246.26,100.59 2246.85,100 v2(2317.8,100) ; v2(2992.8,2290) C4.1 ; R24.1@3067.8,610 v2(3067.8,662.56) ; v2(3152.8,2290) C3.2
IP+: F1.2 IC1.1 IC1.2 R22.1
Isens: C33.1 R21.1 U4.24 | length 1333.9
  Top Layer w16: C33.1 834.16,479.31 834.16,435.85 850,420 1935.83,420 1945.2,429.37 1945.2,450.74 1945.33,450.87 U4.24
  Top Layer w24: C33.1 834.45,480.98 834.45,589.02 R21.1
Lpt_A: C21.2 C34.2 P3.1
  other v1: 67.8,3780 157.8,3780 247.8,3780 337.8,3780 427.8,3780 517.8,3780 607.8,3780 697.8,3780 787.8,3780 877.8,3780 967.8,3780 112.8,3870 202.8,3870 292.8,3870 382.8,3870 472.8,3870 562.8,3870 652.8,3870 742.8,3870 832.8,3870 922.8,3870 1012.8,3870 1192.8,3870 67.8,3960 157.8,3960 247.8,3960 337.8,3960 427.8,3960 517.8,3960 607.8,3960 697.8,3960 787.8,3960 877.8,3960 967.8,3960 112.8,4050 202.8,4050 292.8,4050 382.8,4050 472.8,4050 562.8,4050 652.8,4050 742.8,4050 832.8,4050 922.8,4050 1012.8,4050 1192.8,4050 67.8,4140 157.8,4140 247.8,4140 337.8,4140 427.8,4140 517.8,4140 607.8,4140 877.8,4140 967.8,4140 112.8,4230 202.8,4230 292.8,4230 382.8,4230 472.8,4230 562.8,4230 922.8,4230 1012.8,4230 1192.8,4230
Lpt_B: C23.2 C38.2 P4.1
  other v1: 2317.8,3780 2407.8,3780 2497.8,3780 2587.8,3780 2677.8,3780 2767.8,3780 2857.8,3780 2947.8,3780 3037.8,3780 3127.8,3780 2362.8,3870 2452.8,3870 2542.8,3870 2632.8,3870 2722.8,3870 2812.8,3870 2902.8,3870 2992.8,3870 3082.8,3870 3172.8,3870 2407.8,3960 2497.8,3960 2587.8,3960 2677.8,3960 2767.8,3960 2857.8,3960 2947.8,3960 3037.8,3960 3127.8,3960 2362.8,4050 2452.8,4050 2542.8,4050 2632.8,4050 2722.8,4050 2812.8,4050 2902.8,4050 2992.8,4050 3082.8,4050 3172.8,4050 2407.8,4140 2767.8,4140 2857.8,4140 2947.8,4140 3037.8,4140 3127.8,4140 2362.8,4230 2452.8,4230 2722.8,4230 2812.8,4230 2902.8,4230 2992.8,4230 3082.8,4230 3172.8,4230
MISO: ISP.4 U4.16 | length 177.8
  Top Layer w15.7: U4.16 ISP.4@2051.81,920
MOSI: ISP.1 U4.15 | length 321.2
  Top Layer w15.7: U4.15 2082.8,742.72 2082.8,1010 2092.8,1020 ISP.1
NetC7_1: C7.1 R3.2 R7.2 U1.1 U1.2 | length 500.4
  Top Layer w24: U1.2 U1.1 1106.27,1719.81 1147.98,1719.81 1177.8,1690 C7.1 1219.33,1634.06 1233.39,1620 1406.93,1620 R3.2 R7.2
NetC10_1: C10.1 R8.2 R10.2 U2.1 U2.2 | length 512.3
  Top Layer w24: U2.2 U2.1 2515.27,1719.81 2557.98,1719.81 2587.8,1690 2630.24,1690 C10.1 2634.33,1634.06 2648.39,1620 R8.2 R10.2
NetC11_2: C11.2 U1.11 | length 158.1
  Top Layer w24: C11.2@737.8,1882.99 824.8,1882.99 837.8,1870 U1.11@890.51,1870
NetC17_2: C17.2 U2.11 | length 135.6
  Top Layer w24: C17.2 2174.8,1870 U2.11
NetC21_1: C21.1 C22.2 C34.1 C35.2 C36.2 C37.2 L2.2 P7.1
  other v1: 67.8,3150 157.8,3150 247.8,3150 337.8,3150 427.8,3150 517.8,3150 607.8,3150 697.8,3150 787.8,3150 877.8,3150 967.8,3150 1057.8,3150 1147.8,3150 1237.8,3150 1327.8,3150 1417.8,3150 112.8,3240 202.8,3240 292.8,3240 382.8,3240 472.8,3240 562.8,3240 652.8,3240 742.8,3240 832.8,3240 922.8,3240 1012.8,3240 1102.8,3240 1192.8,3240 1282.8,3240 1372.8,3240 1462.8,3240 67.8,3330 157.8,3330 247.8,3330 337.8,3330 427.8,3330 517.8,3330 607.8,3330 697.8,3330 787.8,3330 877.8,3330 967.8,3330 1057.8,3330 1147.8,3330 1237.8,3330 1327.8,3330 1417.8,3330 112.8,3420 202.8,3420 292.8,3420 382.8,3420 472.8,3420 562.8,3420 652.8,3420 742.8,3420 832.8,3420 922.8,3420 1012.8,3420 1102.8,3420 1192.8,3420 1282.8,3420 1372.8,3420 1462.8,3420 67.8,3510 337.8,3510 427.8,3510 517.8,3510 967.8,3510 1147.8,3510 1327.8,3510 1417.8,3510 112.8,3600 382.8,3600 472.8,3600 562.8,3600 742.8,3600 922.8,3600 1012.8,3600 1102.8,3600 1192.8,3600 1282.8,3600 1372.8,3600 1462.8,3600 1327.8,3690 1417.8,3690 1372.8,3780 1462.8,3780 1417.8,3870 1462.8,3960 1417.8,4050 1462.8,4140 1552.8,4140 1417.8,4230 1507.8,4230 1597.8,4230
NetC22_1: C22.1 C23.1 C35.1 C36.1 C37.1 C38.1 L4.2 P9.1
  other v1: 1867.8,3150 1867.8,3150 1957.8,3150 1957.8,3150 2047.8,3150 2137.8,3150 2227.8,3150 2317.8,3150 2407.8,3150 2497.8,3150 2587.8,3150 2677.8,3150 2767.8,3150 2857.8,3150 2857.8,3150 2947.8,3150 2947.8,3150 3037.8,3150 3037.8,3150 3127.8,3150 3127.8,3150 1912.8,3240 1912.8,3240 2002.8,3240 2092.8,3240 2182.8,3240 2272.8,3240 2362.8,3240 2452.8,3240 2542.8,3240 2632.8,3240 2722.8,3240 2812.8,3240 2812.8,3240 2902.8,3240 2902.8,3240 2992.8,3240 2992.8,3240 3082.8,3240 3082.8,3240 3172.8,3240 3172.8,3240 1867.8,3330 1867.8,3330 1957.8,3330 1957.8,3330 2047.8,3330 2137.8,3330 2227.8,3330 2317.8,3330 2407.8,3330 2497.8,3330 2587.8,3330 2677.8,3330 2767.8,3330 2857.8,3330 2857.8,3330 2947.8,3330 2947.8,3330 3037.8,3330 3037.8,3330 3127.8,3330 3127.8,3330 1912.8,3420 1912.8,3420 2002.8,3420 2092.8,3420 2182.8,3420 2272.8,3420 2362.8,3420 2452.8,3420 2542.8,3420 2632.8,3420 2722.8,3420 2812.8,3420 2812.8,3420 2902.8,3420 2902.8,3420 2992.8,3420 2992.8,3420 3082.8,3420 3082.8,3420 3172.8,3420 3172.8,3420 1867.8,3510 1867.8,3510 1957.8,3510 1957.8,3510 2587.8,3510 2587.8,3510 2767.8,3510 2767.8,3510 2857.8,3510 2857.8,3510 2947.8,3510 2947.8,3510 1912.8,3600 1912.8,3600 2002.8,3600 2002.8,3600 2182.8,3600 2182.8,3600 2362.8,3600 2362.8,3600 2542.8,3600 2542.8,3600 2632.8,3600 2632.8,3600 2722.8,3600 2722.8,3600 2812.8,3600 2812.8,3600 2902.8,3600 2902.8,3600 2992.8,3600 2992.8,3600 1867.8,3690 1867.8,3690 1957.8,3690 1957.8,3690 2047.8,3690 2047.8,3690 1912.8,3780 1912.8,3780 1867.8,3870 1867.8,3870 1957.8,3870 1957.8,3870 1912.8,3960 1912.8,3960 1867.8,4050 1867.8,4050 1957.8,4050 1957.8,4050 1822.8,4140 1822.8,4140 1912.8,4140 1912.8,4140 1777.8,4230 1777.8,4230 1867.8,4230 1867.8,4230 1957.8,4230 1957.8,4230
NetC32_1: C32.1 IC1.6 | length 340.9
  Top Layer w24: IC1.6@669.97,538.29 IC1.6 669.97,536.7 622.25,536.7 611.49,525.94 611.49,339.06 625.55,325 C32.1
NetD1_2: D1.2 R12.1 R13.2 R14.2 | length 285
  Top Layer w24: R12.1@598.23,865 600.73,862.5 699.86,862.5 R13.2 R14.2 693.78,948.58 693.78,1018.38 682.16,1030 D1.2
NetD4_1: D4.1 R25.1 | length 72.3
  Top Layer w24: D4.1 R25.1
NetD5_1: D5.1 R26.1 | length 85.1
  Top Layer w24: R26.1 D5.1@3073.31,1025
NetIC1_7: IC1.7 R21.2 | length 94.8
  Top Layer w24: IC1.7 671.56,588.29 762.86,588.29 R21.2
NetP1_4: P1.4 R23.2 R24.2 | length 196.8
  Top Layer w24: R23.2@2993.23,530 2995.94,527.28 3067.51,527.28 R24.2@3067.8,527.57 ; R24.2@3072.08,531.28 3071.8,531.57 R24.2@3067.8,527.57 ; P1.4 3175.51,522.28 3070.08,522.28 R24.2 R24.2@3067.8,527.57
NetQ1_1: Q1.1 R1.2 | length 155.7
  Top Layer w24: R1.2@612.8,2234.33 Q1.1
NetQ2_1: Q2.1 R2.2 | length 171.8
  Top Layer w24: R2.2 2022.8,2234.33 Q2.1
NetQ3_1: Q3.1 R5.1 | length 180
  Top Layer w24: R5.1@1172.8,2210 Q3.1
NetQ4_1: Q4.1 R6.1 | length 180
  Top Layer w24: R6.1@2582.8,2210 Q4.1@2582.8,2390
NetR4_1: R4.1 U1.4 | length 123.7
  Top Layer w24: U1.4 1106.27,1869.81 1147.98,1869.81 1177.8,1840 R4.1
NetR9_2: R9.2 U2.4 | length 129.7
  Top Layer w24: U2.4 2562.8,1870 2586.8,1846 2626.37,1846 R9.2
NetR15_1: R15.1 R18.2 T1.2 | length 239.6
  Top Layer w24: T1.2 1767.54,240 1785.21,222.33 1785.46,222.33 1827.8,180 R15.1@1827.8,154.37 ; R15.1 R18.2
NetR16_1: R16.1 R19.2 T2.2 | length 257
  Top Layer w24: T2.2 1033.74,240 1093.74,180 1093.74,134.05 R16.1 R19.2
NetR17_1: R17.1 R20.2 T3.2 | length 266.2
  Top Layer w24: T3.2 1397.54,240 1415.21,222.33 1415.46,222.33 1458.47,179.33 1458.47,134.76 R17.1 R20.2
PWM_A: R3.1 U4.14 | length 1468.8
  Top Layer w15.7: R3.1 1834,1550 2257.8,1126.2 2257.8,963.01 2114.8,820.02 U4.14
PWM_B: R8.1 U4.13 | length 1087.1
  Top Layer w15.7: U4.13 2146.3,805.22 2822.8,1481.72 R8.1
RST: C16.1 ISP.5 R11.1 U4.29 | length 1023.4
  Top Layer w24: v2(2177.8,480) 2177.58,479.78 2177.58,192.39 R11.1 2178.35,191.19 2178.35,103.16 C16.1
  Bottom Layer w15.7: ISP.5 1982.8,969.02 1982.8,678 v2@2181.8,479
Rx: P1.3 U4.30 | length 1393.2
  Top Layer w15.7: U4.30 2209.29,308.5 2387.8,130 2948.6,130 2957.8,139.2 2957.8,410.8 2966.99,420 P1.3
SCK: ISP.3 U4.17 | length 369.7
  Top Layer w15.7: U4.17 1980.94,969.13 ISP.3
sw1: R1.1 SW1.1 U1.12 | length 785.9
  Top Layer w24: SW1.1@823.13,2225.33 SW1.1@827.8,2230 ; SW1.1 R1.1 717.8,2224.67 717.8,2160 647.8,2090 647.8,1834.06 661.85,1820 U1.12
sw2: R5.2 SW2.1 U1.6 | length 439.9
  Top Layer w24: SW2.1 1060.63,2225 1065.63,2220 R5.2 1070.63,2122.17 1156.62,2036.17 1156.62,1984.06 1142.56,1970 U1.6
sw3: R2.1 SW3.1 U2.12 | length 756.4
  Top Layer w24: SW3.1 R2.1 2122.8,2147.79 2067.8,2092.79 2067.8,1844.06 2091.85,1820 U2.12
sw4: R6.2 SW4.1 U2.6 | length 440.3
  Top Layer w24: SW4.1 R6.2 2480.63,2127.17 2565.62,2042.17 2565.62,1984.06 2551.56,1970 U2.6
TSens1: C25.1 R18.1 U4.27 | length 327.7
  Top Layer w15.7: C25.1 2015.72,239 2076.8,239 2114.8,277.01 U4.27
  Top Layer w24: R18.1@2013.98,130.74 C25.1@2013.98,239.25
TSens2: C26.1 R19.1 U4.25 | length 994.7
  Top Layer w15.7: C26.1 1281.26,283.46 1312.8,315 2042.59,315 2051.79,324.2 U4.25
  Top Layer w24: R19.1@1282.24,130.98 C26.1@1282.24,239.01
TSens3: C27.1 R20.1 U4.26 | length 636.4
  Top Layer w15.7: C27.1 1659.46,248.2 1685.99,248.2 1727.1,289.3 2073.41,289.3 2083.31,299.2 U4.26
  Top Layer w24: R20.1@1652.24,130.98 C27.1@1652.24,230
Tx: R23.1 U4.31 | length 1162.7
  Top Layer w15.7: U4.31 2240.79,317.01 2397.8,160 2903.17,160 2912.36,169.2 R23.1
Vin: F1.1 P2.1
Vsens: C31.1 R13.1 U4.23 | length 1460.5
  Top Layer w16: C31.1 889.33,695.56 1102.53,482.36 U4.23
  Top Layer w24: R13.1 C31.1
X1: C14.1 U4.7 Y1.1 | length 882.4
  Top Layer w15.7: U4.7 2552.09,639.84 2721.94,470 2727.8,464.14 Y1.1 Y1.1@2724.8,330
  Top Layer w24: C14.1 2540.87,456.93 2667.8,330 Y1.1@2724.8,330
X2: C15.1 U4.8 Y1.2 | length 588.9
  Top Layer w15.7: U4.8 2629.13,671.34 2664.8,707.01 Y1.2
  Top Layer w24: Y1.2 C15.1
pads on no net: P1.5 P1.6 PS1.6 PS1.10 U1.8 U1.9 U1.10 U1.14 U2.8 U2.9 U2.10 U2.14 U4.1 U4.2 U4.3 U4.6 U4.10 U4.11 U4.12 U4.19 U4.20 U4.22 U4.28 U4.32

## Polygon pours and split planes (outlines as drawn)
12V on Top Layer "12V_L01_P032" (solid, remove dead copper, pour order 32): 3259.59,2433.79 3259.59,1094.79 279.59,1094.79 279.59,2433.79
30V on Top Layer "30V_L01_P031" (solid, pour order 31): 547.8,2410 652.6,2410 652.6,2330 767.8,2330 767.8,2420 2047.8,2420 2047.8,2340 2187.8,2340 2187.8,2410 3267.78,2410 3267.78,2625 192.8,2625 ccw(c192.79,2560.01) 127.8,2560 127.79,480 ccw(c177.79,480) 177.8,430 497.8,430 ccw(c497.8,480) 547.8,480
GND on Top Layer "GND_L01_P030" (solid, pour order 30): 317.74,1630 677.8,1630 677.8,2410 314.67,2410 ccw(c314.67,2375.46) 280.12,2375.64 276.44,1671.52 ccw(c317.74,1671.3)
B on Top Layer "B_L01_P022" (solid, pour order 22): 2283.62,2334.18 2343.51,2274.29 cw(c2277.63,2208.41) 2370.8,2208.41 2370.8,1593 cw(c2347.8,1593) 2347.8,1570 2097.8,1570 cw(c2097.8,1590) 2077.8,1590 2077.8,2320 cw(c2102.79,2320) 2102.8,2345 2157.38,2345 ccw(c2157.38,2360.41) 2172.8,2360.41 2172.8,2405 2172.8,2495 cw(c2192.79,2495) 2192.8,2515 2722.8,2515 cw(c2722.8,2505) 2732.8,2505 2732.8,2365 cw(c2722.8,2365) 2722.8,2355 2642.8,2355 cw(c2642.79,2365) 2632.8,2365 2632.79,2428.38 ccw(c2616.17,2428.38) 2616.17,2445 2289.42,2445 ccw(c2289.42,2428.38) 2272.8,2428.38 2272.8,2360.31 ccw(c2309.75,2360.31)
A on Top Layer "A_L01_P020" (solid, pour order 20): 873.62,2324.18 990.72,2207.07 cw(c947.11,2163.45) 1008.8,2163.44 1008.8,1581 cw(c996.8,1581) 996.8,1569 678.8,1569 cw(c678.79,1580) 667.8,1580 667.8,2320 cw(c682.79,2320) 682.8,2335 742.6,2335 ccw(c742.6,2355.19) 762.8,2355.2 762.8,2395 762.8,2495 cw(c772.79,2495) 772.8,2505 1312.8,2505 cw(c1312.8,2495) 1322.8,2495 1322.8,2355 cw(c1312.8,2355) 1312.8,2345 1232.8,2345 cw(c1232.8,2355) 1222.8,2355 1222.79,2422.62 ccw(c1210.42,2422.62) 1210.42,2435 873.62,2435 ccw(c873.62,2424.18) 862.8,2424.18 862.8,2350.31 ccw(c899.75,2350.31)
Lpt_B on Top Layer "LPT_B_L01_P039" (solid, pour order 39): 3267.8,4330 2107.8,4330 2107.8,3670 3267.8,3670
5V on Top Layer "5V_L01_P042" (solid, remove dead copper, pour order 42): 507.8,1133.06 507.8,0 3267.8,0 3267.8,1145.42
NetC21_1 on Top Layer "NETC21_1_L01_P033" (solid, pour order 33): -2.2,3670 1237.8,3670 1237.8,4330 1647.8,4330 1647.8,3070 -2.2,3070
NetC22_1 on Top Layer "NETC22_1_L01_P036" (solid, pour order 36): 1707.8,3070 3267.8,3070 3267.8,3665 2107.8,3665 2107.8,4330 1707.8,4330
Lpt_A on Top Layer "LPT_A_L01_P038" (solid, pour order 38): 1237.8,4330 -2.2,4330 -2.2,3670 1237.8,3670
A on Top Layer "A_L01_P043" (solid, pour order 43): 1677.8,2990 -2.2,2990 -2.2,2640 1677.8,2640
B on Top Layer "B_L01_P045" (solid, pour order 45): 1687.8,2990 3267.8,2990 3267.8,2640 1687.8,2640
GND on Top Layer "GND_L01_P041" (solid, pour order 41): 0,0 225.31,0 225.31,372.48 ccw(c177.8,372.48) 177.79,420 167.8,420 cw(c167.79,470) 117.8,470 117.8,1130 ccw(c77.8,1130) 77.8,1170 0,1170
IP+ on Top Layer "IP+_L01_P026" (solid, remove dead copper, pour order 26): 262.8,745 262.8,585 ccw(c282.8,585) 282.8,565 532.8,565 ccw(c532.8,580) 547.8,580 547.8,740 ccw(c522.8,740) 522.8,765 282.8,765 ccw(c282.79,745)
Vin on Top Layer "VIN_L01_P028" (solid, pour order 28): 287.8,370 447.8,370 cw(c447.8,320) 497.79,320 497.8,0 237.8,0 237.8,320 cw(c287.79,320)
GND on Top Layer "GND_L01_P029" (solid, pour order 29): 927.8,910 927.8,820 1082.8,820 1119.8,857 1119.8,1008 1133.02,1021.22 1366.57,1021.22 1367.98,1110 1082.8,1110 1082.8,1295 1017.8,1295 1018.48,1294.32 1018.48,1094.37 995.12,1094.37 964.37,1063.62 766.26,1063.62 766.26,996.38 737.8,967.91 737.8,910
Lpt_A on Bottom Layer "LPT_A_L02_P049" (solid, pour order 49): 1237.8,4330 -2.2,4330 -2.2,3670 1237.8,3670
Lpt_B on Bottom Layer "LPT_B_L02_P050" (solid, pour order 50): 3267.8,4330 2107.8,4330 2107.8,3670 3267.8,3670
NetC22_1 on Bottom Layer "NETC22_1_L02_P048" (solid, pour order 48): 1707.8,3070 3267.8,3070 3267.8,3665 2107.8,3665 2107.8,4330 1707.8,4330
B on Bottom Layer "B_L02_P052" (solid, pour order 52): 1687.8,2990 3267.8,2990 3267.8,2620 3227.8,2620 1687.8,2620
A on Bottom Layer "A_L02_P051" (solid, pour order 51): 1677.8,2990 -2.2,2990 -2.2,2620 1677.8,2620
NetC21_1 on Bottom Layer "NETC21_1_L02_P047" (solid, pour order 47): -2.2,3670 1237.8,3670 1237.8,4330 1647.8,4330 1647.8,3070 -2.2,3070
GND on Bottom Layer "GND_L02_P044" (solid, pour order 44): 0,2535 0,0 3267.79,0 3267.79,2535
A on Bottom Layer "A_L02_P019" (solid, pour order 19): 873.62,2324.18 990.72,2207.07 cw(c947.11,2163.45) 1008.8,2163.44 1008.8,1581 cw(c996.8,1581) 996.8,1569 678.8,1569 cw(c678.79,1580) 667.8,1580 667.8,2320 cw(c682.79,2320) 682.8,2335 742.6,2335 ccw(c742.6,2355.19) 762.8,2355.2 762.8,2395 762.8,2495 cw(c772.79,2495) 772.8,2505 1312.8,2505 cw(c1312.8,2495) 1322.8,2495 1322.8,2355 cw(c1312.8,2355) 1312.8,2345 1232.8,2345 cw(c1232.8,2355) 1222.8,2355 1222.79,2422.62 ccw(c1210.42,2422.62) 1210.42,2435 873.62,2435 ccw(c873.62,2424.18) 862.8,2424.18 862.8,2350.31 ccw(c899.75,2350.31)
B on Bottom Layer "B_L02_P024" (solid, pour order 24): 2283.62,2334.18 2343.51,2274.29 cw(c2277.63,2208.41) 2370.8,2208.41 2370.8,1593 cw(c2347.8,1593) 2347.8,1570 2097.8,1570 cw(c2097.8,1590) 2077.8,1590 2077.8,2320 cw(c2102.79,2320) 2102.8,2345 2157.38,2345 ccw(c2157.38,2360.41) 2172.8,2360.41 2172.8,2405 2172.8,2495 cw(c2192.79,2495) 2192.8,2515 2722.8,2515 cw(c2722.8,2505) 2732.8,2505 2732.8,2365 cw(c2722.8,2365) 2722.8,2355 2642.8,2355 cw(c2642.79,2365) 2632.8,2365 2632.79,2428.38 ccw(c2616.17,2428.38) 2616.17,2445 2289.42,2445 ccw(c2289.42,2428.38) 2272.8,2428.38 2272.8,2360.31 ccw(c2309.75,2360.31)
B on Bottom Layer "B_L02_P040" (solid, pour order 40): 1997.8,2990 2737.8,2990 2737.8,2340 2627.8,2340 2627.8,2460 2277.8,2460 2277.8,2340 2167.8,2340 2167.8,2460 2017.8,2460 1997.8,2460
A on Bottom Layer "A_L02_P025" (solid, pour order 25): 587.8,2990 1327.8,2990 1327.8,2330 1217.8,2330 1217.8,2450 867.8,2450 867.8,2330 757.8,2330 757.8,2450 607.8,2450 587.8,2450

## Keep-outs
Keep-Out Layer:
  the board outline again, w10

## Other copper
Top Layer:
  pour cut-out: 2609.8,839 2845.8,839 2845.8,211 2846.8,210 2608.8,210
Bottom Layer:
  pour cut-out: 2605.8,843 2841.8,843 2840.8,842 2840.8,213 2603.8,213

## Silkscreen, mask and mechanical layers (free items; w line width, h text height)
Top Overlay:
  text "OUTPUT" at 1560,4270 h40
  text "SHORT" at 185,585 h30
  text "INPUT" at 140,285 h40
  text "-" at 92.8,205 h60
  text "+" at 347.8,205 h60
Bottom Overlay:
  region: 2099 vertices and 47 holes, not listed, extent 1314.58,1446.85 2122.73,2254.84
  text "ZEBRA" at 1797.8,1370 h40
  text "Inverter" at 1847.8,1310 h40
  text "Suzanne Lo" at 1897.8,1240 h40
  text "Alexander Bailey" at 1987.8,1173.33 h40

## Text inside footprints (layer, text, board x,y; h text height)
ISP: Top Overlay "1" at 2202.8,1010 h30